# EAGLE board iBaoFeng (EAGLE 6.5.0)
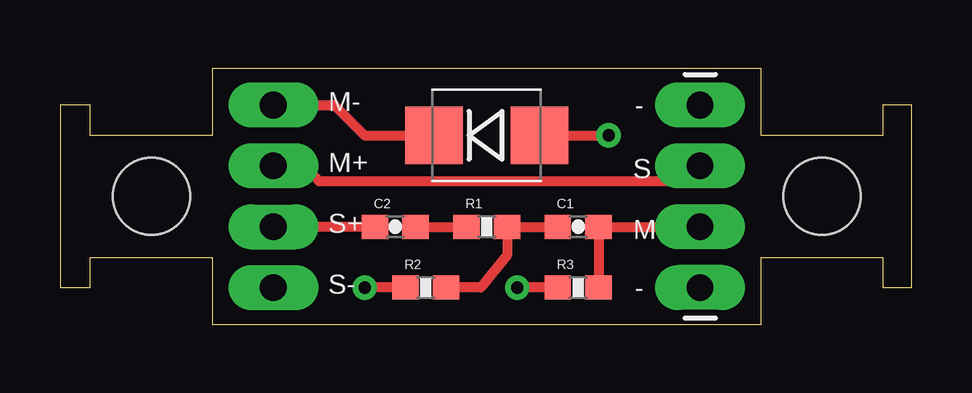
[diagram p0: board, top side]
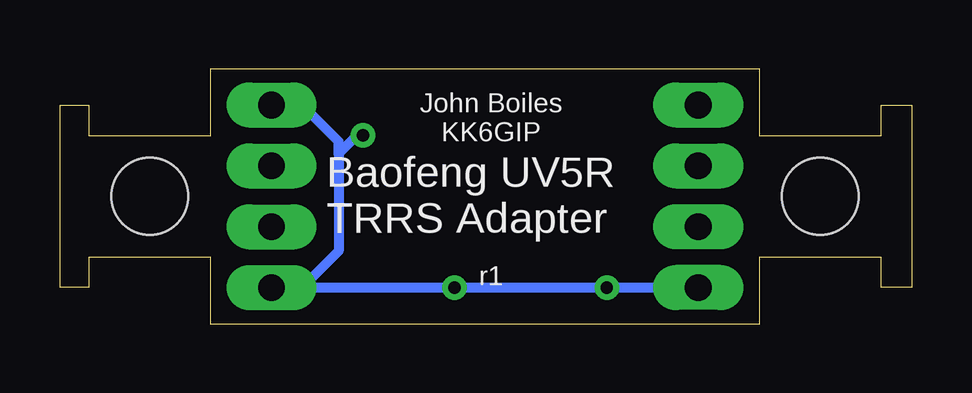
[diagram p1: board, bottom side, seen from below]

Size 35.48 x 10.67 mm. Coordinates in mm from the lower left corner, seen from the top.
Outline: 0,1.52 1.27,1.52 1.27,2.79 6.35,2.79 6.35,0 29.21,0 29.21,2.79 34.29,2.79 34.29,1.52 35.48,1.52 35.48,9.13 34.29,9.14 34.29,7.87 29.21,7.87 29.21,10.67 6.35,10.67 6.35,7.87 1.27,7.87 1.27,9.13 0,9.13 0,1.52
Copper layers (1*16): Top 0.035mm / dielectric 1.5mm / Bottom 0.035mm
Design rules "SparkFun": minimum track width 8mil, minimum drill 20mil, track to track 8mil, track to pad 8mil, pad to pad 8mil, via to via 8mil, smd to smd 8mil, copper to edge 10mil, drill to drill 8mil, minimum pad ring 12mil, minimum via ring 10mil, stop-mask expansion 4mil, vias tented up to drill 25mil, thermal gap 10mil
Holes 3.2 mm at 3.81,5.33 31.75,5.33

## Footprints (pad centres in the part's own frame; a part is rotated, then mirrored left to right if it is on the bottom)
0603-CAP = smd 1.1 x 1: 1 -0.85,0; 2 0.85,0
SMB-DIODE = smd 2.4 x 2.4: A 2.2,0; C -2.2,0
1X02_LONGPADS = drill 1.118 pad 1.88 long: 1 0,0; 2 2.54,0
1X04_LONGPADS = drill 1.118 pad 1.88 long: 1 0,0; 2 2.54,0; 3 5.08,0; 4 7.62,0
0603-RES = smd 1.1 x 1: 1 -0.85,0; 2 0.85,0

## Placement (x,y rotation side)
C1  .01uF  [0603-CAP]  21.59,4.06 0 top
C2  .01uF  [0603-CAP]  13.97,4.06 180 top
D1  [SMB-DIODE]  17.78,7.87 0 top
JP1  M02PTH3  [1X02_LONGPADS]  8.89,4.06 270 top
JP2  M02PTH3  [1X02_LONGPADS]  8.89,6.6 90 top
JP3  [1X04_LONGPADS]  26.67,1.52 90 top
R1  10k  [0603-RES]  17.78,4.06 0 top
R2  2.2k  [0603-RES]  15.24,1.52 0 top
R3  2.2k  [0603-RES]  21.59,1.52 0 top

## Library data of the parts
C1 C2 R1-R3 = SparkFun-Passives
D1 = SparkFun-DiscreteSemi
JP1-JP3 = SparkFun-Connectors

## Nets
BAOFENGMIC+: JP2.1 JP3.3
BAOFENGMIC-: D1.C JP2.2
BAOFENGSPK+: C2.2 JP1.1
GND: D1.A JP1.2 JP3.1 JP3.4 R2.1 R3.1
N$3: C1.1 R1.2 R2.2
N$4: C1.2 JP3.2 R3.2
N$6: C2.1 R1.1

## Tracks (layer width: path | path; a pad name or v marks a point on that pad's centre or on a via)
BAOFENGMIC+
  Top 0.406: JP2.1 10.16,6.6 10.79,5.97 26.04,5.97 JP3.3
BAOFENGMIC-
  Top 0.406: JP2.2 11.43,9.14 12.7,7.87 D1.C
BAOFENGSPK+
  Top 0.406: C2.2 JP1.1
GND  (via drill 0.51)
  Top 0.406: D1.A v22.86,7.87 | R2.1 v12.7,1.52 | R3.1 v19.05,1.52
  Bottom 0.406: JP3.1 25.4,1.52 | 25.4,1.52 v19.05,1.52 v12.7,1.52 JP1.2 | v22.86,7.87 23.11,7.87 23.88,7.11 | 23.88,7.11 23.88,3.05 25.4,1.52 | 23.88,7.11 23.88,7.62 25.4,9.14 JP3.4
N$3
  Top 0.406: C1.1 R1.2 18.63,2.88 17.53,1.52 R2.2
N$4
  Top 0.406: R3.2 C1.2 JP3.2
N$6
  Top 0.406: C2.1 R1.1

## Text on the board
tNames: M- | - | M+ | S | S+ | M | - | S-
bNames: John Boiles / KK6GIP | Baofeng UV5R / TRRS Adapter | r1